# EAGLE board sparkfun-battery-babysitter-panel-v10 (EAGLE 7.5.0), part 1 of 7
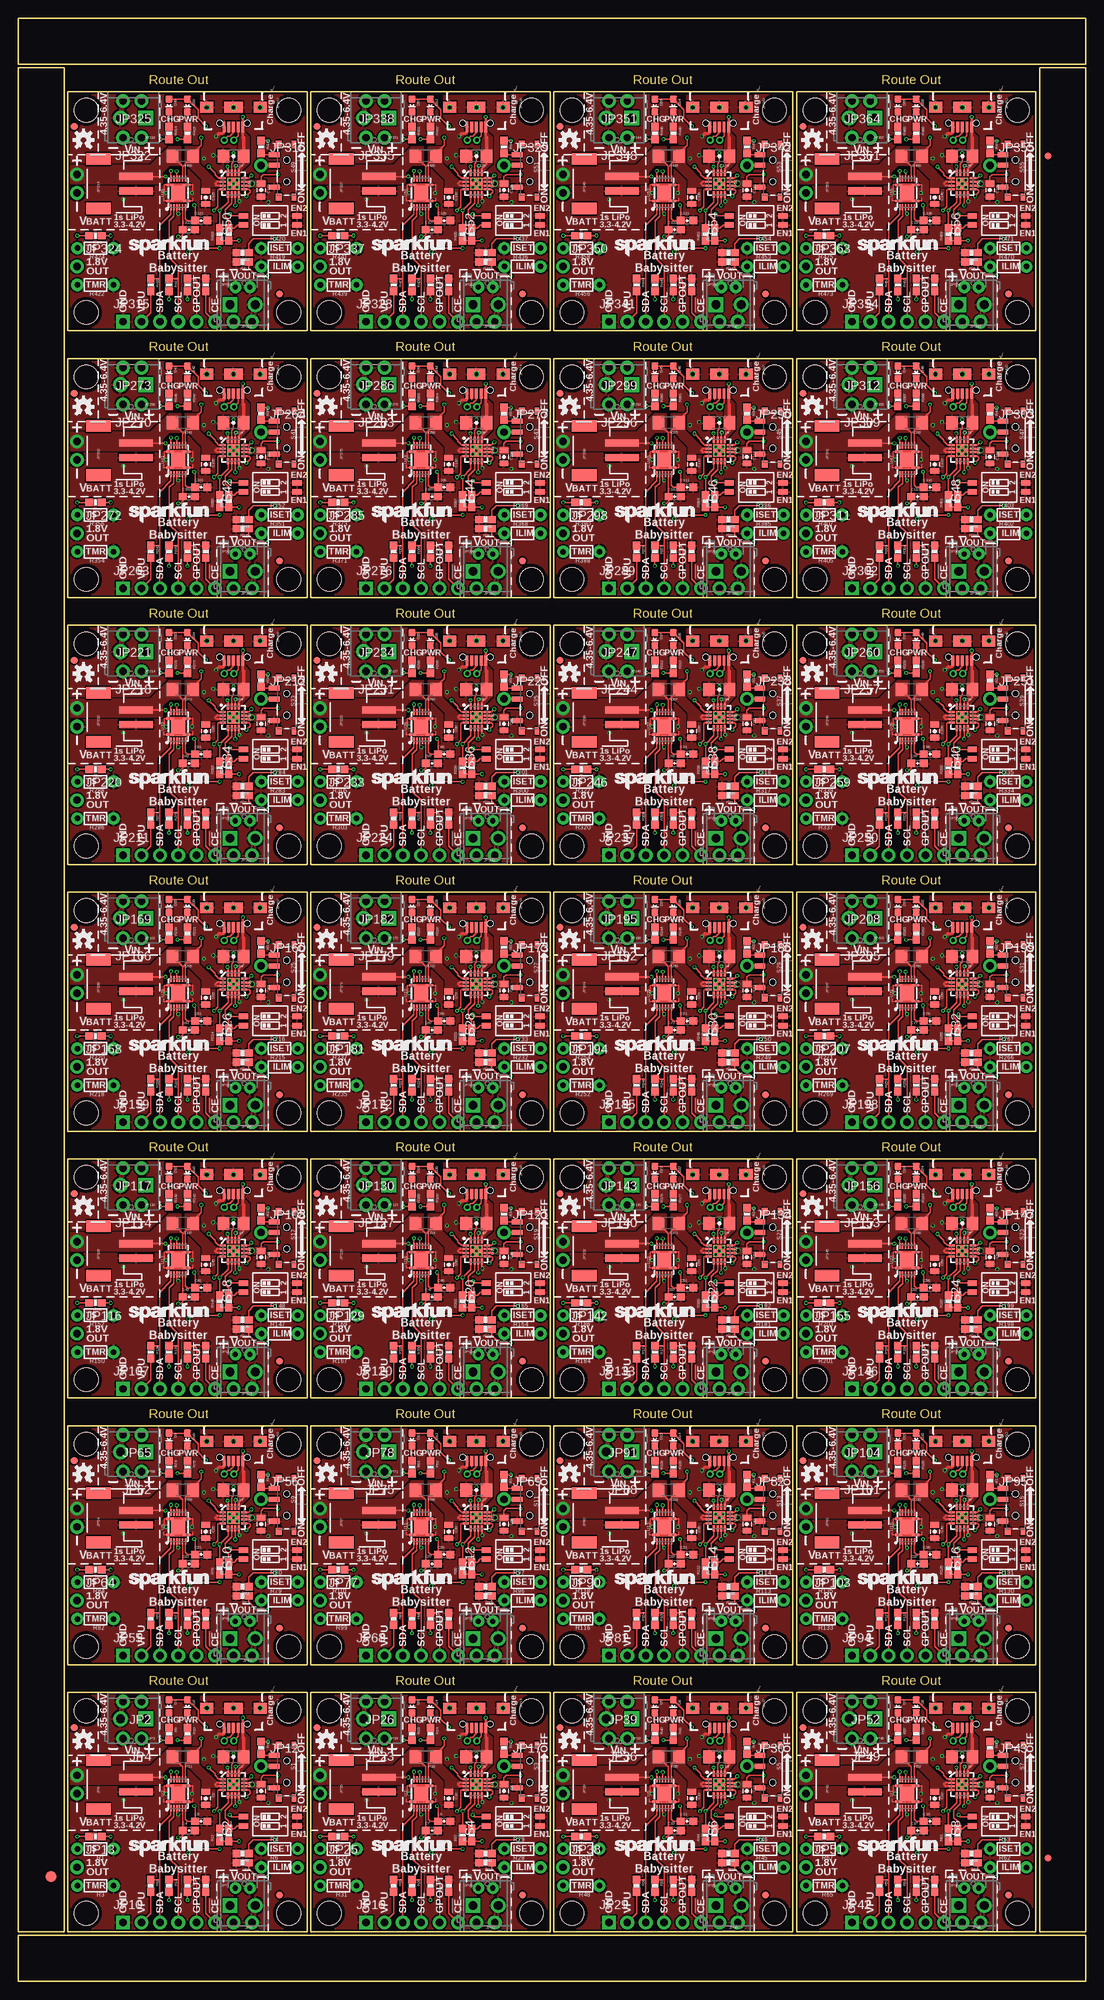
[diagram p0: board, top side]
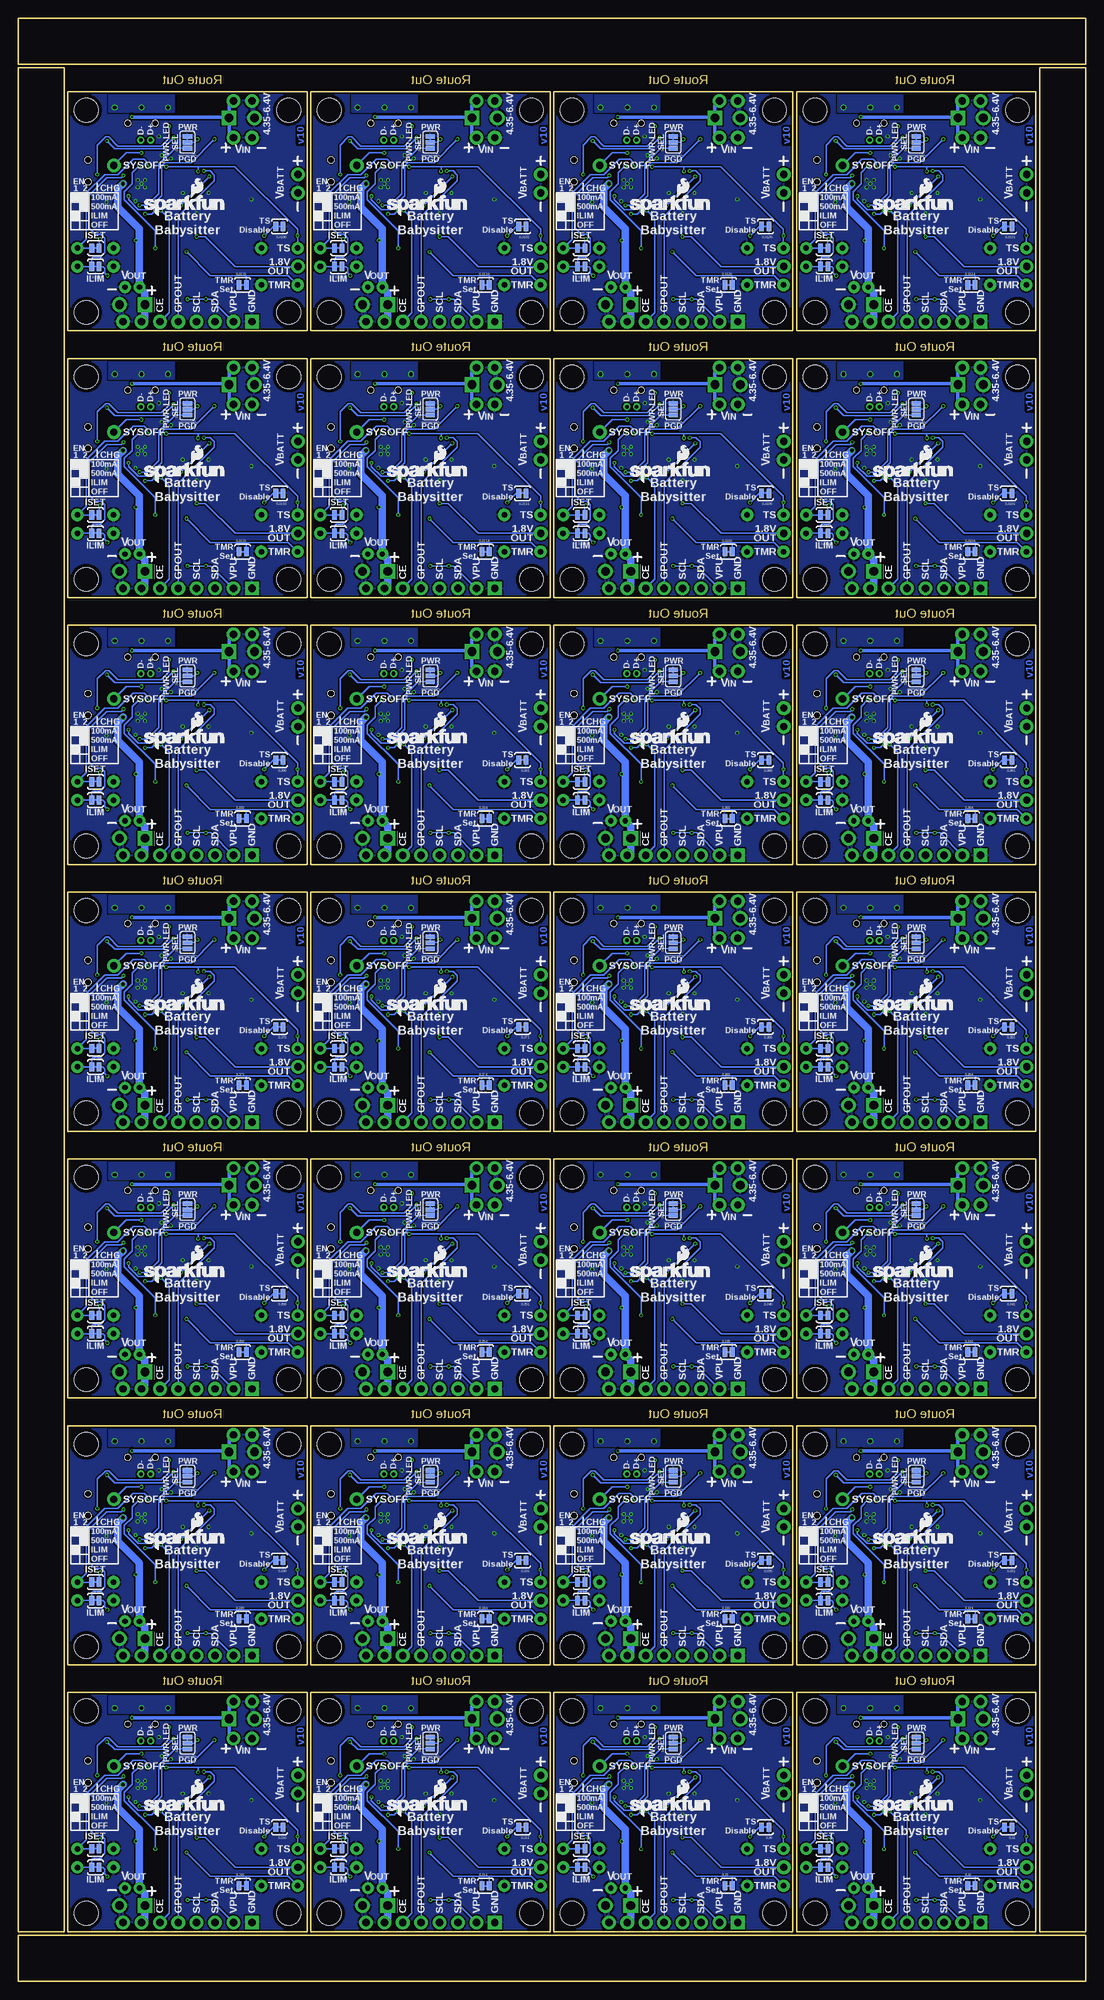
[diagram p1: board, bottom side, seen from below]

Size 147.32 x 271.02 mm. Coordinates in mm from the lower left corner, seen from the top.
Outline: 6.35,79.25 6.35,6.86 0,6.86 0,29.72
Outline: 0,27.18 0,264.16 6.35,264.16 6.35,76.71
Outline: 79.25,0 0,0 0,6.35 29.72,6.35
Outline: 27.18,6.35 147.32,6.35 147.32,0 76.71,0
Outline: 147.32,79.25 147.32,6.86 140.97,6.86 140.97,29.72
Outline: 140.97,27.18 140.97,264.16 147.32,264.16 147.32,76.71
Outline: 71.63,271.02 147.32,271.02 147.32,264.67 121.16,264.67
Outline: 123.7,264.67 0,264.67 0,271.02 74.17,271.02
Outline: 6.86,39.88 39.88,39.88 39.88,6.86 6.86,6.86 6.86,39.88
Outline: 40.39,39.88 73.41,39.88 73.41,6.86 40.39,6.86 40.39,39.88
Outline: 73.91,39.88 106.93,39.88 106.93,6.86 73.91,6.86 73.91,39.88
Outline: 107.44,39.88 140.46,39.88 140.46,6.86 107.44,6.86 107.44,39.88
Outline: 6.86,76.71 39.88,76.71 39.88,43.69 6.86,43.69 6.86,76.71
Outline: 40.39,76.71 73.41,76.71 73.41,43.69 40.39,43.69 40.39,76.71
Outline: 73.91,76.71 106.93,76.71 106.93,43.69 73.91,43.69 73.91,76.71
Outline: 107.44,76.71 140.46,76.71 140.46,43.69 107.44,43.69 107.44,76.71
Outline: 6.86,113.54 39.88,113.54 39.88,80.52 6.86,80.52 6.86,113.54
Outline: 40.39,113.54 73.41,113.54 73.41,80.52 40.39,80.52 40.39,113.54
Outline: 73.91,113.54 106.93,113.54 106.93,80.52 73.91,80.52 73.91,113.54
Outline: 107.44,113.54 140.46,113.54 140.46,80.52 107.44,80.52 107.44,113.54
Outline: 6.86,150.37 39.88,150.37 39.88,117.35 6.86,117.35 6.86,150.37
Outline: 40.39,150.37 73.41,150.37 73.41,117.35 40.39,117.35 40.39,150.37
Outline: 73.91,150.37 106.93,150.37 106.93,117.35 73.91,117.35 73.91,150.37
Outline: 107.44,150.37 140.46,150.37 140.46,117.35 107.44,117.35 107.44,150.37
Outline: 6.86,187.2 39.88,187.2 39.88,154.18 6.86,154.18 6.86,187.2
Outline: 40.39,187.2 73.41,187.2 73.41,154.18 40.39,154.18 40.39,187.2
Outline: 73.91,187.2 106.93,187.2 106.93,154.18 73.91,154.18 73.91,187.2
Outline: 107.44,187.2 140.46,187.2 140.46,154.18 107.44,154.18 107.44,187.2
Outline: 6.86,224.03 39.88,224.03 39.88,191.01 6.86,191.01 6.86,224.03
Outline: 40.39,224.03 73.41,224.03 73.41,191.01 40.39,191.01 40.39,224.03
Outline: 73.91,224.03 106.93,224.03 106.93,191.01 73.91,191.01 73.91,224.03
Outline: 107.44,224.03 140.46,224.03 140.46,191.01 107.44,191.01 107.44,224.03
Outline: 6.86,260.86 39.88,260.86 39.88,227.84 6.86,227.84 6.86,260.86
Outline: 40.39,260.86 73.41,260.86 73.41,227.84 40.39,227.84 40.39,260.86
Outline: 73.91,260.86 106.93,260.86 106.93,227.84 73.91,227.84 73.91,260.86
Outline: 107.44,260.86 140.46,260.86 140.46,227.84 107.44,227.84 107.44,260.86
Copper layers (1*16): Top 0.035mm / dielectric 1.5mm / Bottom 0.035mm
Design rules "SparkFun-2-layer-FAB-LIMIT *": minimum track width 7mil, minimum drill 6mil, track to track 7mil, track to pad 7mil, pad to pad 7mil, via to via 7mil, smd to smd 7mil, copper to edge 7mil, drill to drill 7mil, minimum pad ring 5mil, minimum via ring 5mil, stop-mask expansion 4mil, vias tented up to drill 20mil, thermal gap 10mil

## Footprints (pad centres in the part's own frame; a part is rotated, then mirrored left to right if it is on the bottom)
1206-CAP = smd 1.6 x 1.8: 1 -1.4,0; 2 1.4,0
0805-CAP = smd 0.8 x 1.2: 1 -0.9,0; 2 0.9,0
0603-CAP = smd 1.1 x 1: 1 -0.85,0; 2 0.85,0
LED-0603 = smd 1 x 1: A 0,-0.877; C 0,0.877
FIDUCIAL-1.5X3 = smd 1.5 x 1.5: 1 0,0
FIDUCIAL-1X2 = smd 1 x 1: 1 0,0
USB-AB-MICRO-SMD_V03 = smd 1.4 x 0.4: D+1 2.7,0; D-1 2.7,0.65; GND1 2.7,-1.3; ID1 2.7,-0.65; VBUS1 2.7,1.3 | smd 1.5 x 1.8: SHIELD1 0,3.68; SHIELD3 0,-3.68 | smd 1.5 x 2.5: SHIELD2 0,0 | hole 0.85: 2.2,1.9; 2.2,-1.9
1X02_NO_SILK = drill 1.016 pad 1.88: 1 0,0; 2 2.54,0
SCREWTERMINAL-3.5MM-2-NS = drill 1.2 pad 2.032 square: 1 0,0 | drill 1.2 pad 2.032: 2 3.5,0
JST-2-SMD = smd 1 x 4.6: 1 -1,-3.7; 2 1,-3.7 | smd 1.6 x 3.4: NC1 -3.4,1.5; NC2 3.4,1.5
JST-2-PTH-NS = drill 0.7 pad 1.6: 1 -1,0; 2 1,0
1X04_NO_SILK = drill 1.016 pad 1.88 square: 1 0,0 | drill 1.016 pad 1.88: 2 2.54,0; 3 5.08,0; 4 7.62,0
1X01_NO_SILK = drill 1.016 pad 1.88: 1 0,0
1/6W-RES = drill 0.762 pad 1.676: 1 -2.5,0; 2 2.5,0
0603-RES = smd 1.1 x 1: 1 -0.85,0; 2 0.85,0
1206 = smd 1.6 x 1.8: 1 -1.4,0; 2 1.4,0
SWITCH-SPST-SMD-A = smd 0.7 x 1.5: 1 -2.25,-1.75; 2 -0.75,-1.75; 3 2.25,-1.75 | smd 1 x 0.6: GND1 -3.65,1; GND3 3.65,1 | smd 1 x 0.8: GND2 -3.65,-1.1; GND4 3.65,-1.1 | hole 0.9: -1.5,0; 1.5,0
DIPSWITCH-02-50MIL = smd 0.762 x 1.27: 1 -0.635,-3.7; 2 0.635,-3.7; 3 0.635,3.7; 4 -0.635,3.7
PAD-JUMPER-2-NC_BY_TRACE_YES_SILK = smd 0.635 x 1.27: 1 -0.508,0; 2 0.508,0
PAD-JUMPER-3-2OF3_NC_BY_TRACE_YES_SILK_FULL_BOX = smd 0.635 x 1.27: 1 -0.813,0; 2 0,0; 3 0.813,0
STAND-OFF = hole 3.302: 0,0
PAD.03X.04 = smd 1.016 x 1.016: P$1 0,0
PVQFN-N16 = smd 0.28 x 0.85: 1 -0.75,-1.475; 2 -0.25,-1.475; 3 0.25,-1.475; 4 0.75,-1.475; 9 0.75,1.475; 10 0.25,1.475; 11 -0.25,1.475; 12 -0.75,1.475 | smd 0.85 x 0.28: 5 1.475,-0.75; 6 1.475,-0.25; 7 1.475,0.25; 8 1.475,0.75; 13 -1.475,0.75; 14 -1.475,0.25; 15 -1.475,-0.25; 16 -1.475,-0.75 | smd 1.7 x 1.7: EP 0,0
PDSO-N12 = smd 0.2 x 0.85: 1 -1,-1.975; 2 -0.6,-1.975; 3 -0.2,-1.975; 4 0.2,-1.975; 5 0.6,-1.975; 6 1,-1.975; 7 1,1.975; 8 0.6,1.975; 9 0.2,1.975; 10 -0.2,1.975; 11 -0.6,1.975; 12 -1,1.975 | smd 1.95 x 1.95: EP 0,0 | smd 1 x 0.25: EP1 -1.15,1.1; EP2 -1.15,-1.1; EP3 1.15,-1.1; EP4 1.15,1.1

## Placement (x,y rotation side)
C1  1.0uF  [1206-CAP]  29.72,30.99 180 top
C2  10uF  [0805-CAP]  25.91,25.27 270 top
C3  10uF  [0805-CAP]  33.53,26.29 270 top
C4  0.47uF  [0603-CAP]  23.56,20.83 0 top
C5  1.0uF  [0603-CAP]  25.27,22.1 0 top
C6  1.0uF  [0603-CAP]  58.8,22.1 0 top
C7  0.47uF  [0603-CAP]  57.09,20.83 0 top
C8  10uF  [0805-CAP]  67.06,26.29 270 top
C9  1.0uF  [1206-CAP]  63.25,30.99 180 top
C10  10uF  [0805-CAP]  59.44,25.27 270 top
C11  1.0uF  [0603-CAP]  92.33,22.1 0 top
C12  0.47uF  [0603-CAP]  90.61,20.83 0 top
C13  10uF  [0805-CAP]  100.58,26.29 270 top
C14  1.0uF  [1206-CAP]  96.77,30.99 180 top
C15  10uF  [0805-CAP]  92.96,25.27 270 top
C16  1.0uF  [0603-CAP]  125.86,22.1 0 top
C17  0.47uF  [0603-CAP]  124.14,20.83 0 top
C18  10uF  [0805-CAP]  134.11,26.29 270 top
C19  1.0uF  [1206-CAP]  130.3,30.99 180 top
C20  10uF  [0805-CAP]  126.49,25.27 270 top
C21  1.0uF  [0603-CAP]  25.27,58.93 0 top
C22  0.47uF  [0603-CAP]  23.56,57.66 0 top
C23  10uF  [0805-CAP]  33.53,63.12 270 top
C24  1.0uF  [1206-CAP]  29.72,67.82 180 top
C25  10uF  [0805-CAP]  25.91,62.1 270 top
C26  1.0uF  [0603-CAP]  58.8,58.93 0 top
C27  0.47uF  [0603-CAP]  57.09,57.66 0 top
C28  10uF  [0805-CAP]  67.06,63.12 270 top
C29  1.0uF  [1206-CAP]  63.25,67.82 180 top
C30  10uF  [0805-CAP]  59.44,62.1 270 top
C31  1.0uF  [0603-CAP]  92.33,58.93 0 top
C32  0.47uF  [0603-CAP]  90.61,57.66 0 top
C33  10uF  [0805-CAP]  100.58,63.12 270 top
C34  1.0uF  [1206-CAP]  96.77,67.82 180 top
C35  10uF  [0805-CAP]  92.96,62.1 270 top
C36  1.0uF  [0603-CAP]  125.86,58.93 0 top
C37  0.47uF  [0603-CAP]  124.14,57.66 0 top
C38  10uF  [0805-CAP]  134.11,63.12 270 top
C39  1.0uF  [1206-CAP]  130.3,67.82 180 top
C40  10uF  [0805-CAP]  126.49,62.1 270 top
C41  1.0uF  [0603-CAP]  25.27,95.76 0 top
C42  0.47uF  [0603-CAP]  23.56,94.49 0 top
C43  10uF  [0805-CAP]  33.53,99.95 270 top
C44  1.0uF  [1206-CAP]  29.72,104.65 180 top
C45  10uF  [0805-CAP]  25.91,98.93 270 top
C46  1.0uF  [0603-CAP]  58.8,95.76 0 top
C47  0.47uF  [0603-CAP]  57.09,94.49 0 top
C48  10uF  [0805-CAP]  67.06,99.95 270 top
C49  1.0uF  [1206-CAP]  63.25,104.65 180 top
C50  10uF  [0805-CAP]  59.44,98.93 270 top
C51  1.0uF  [0603-CAP]  92.33,95.76 0 top
C52  0.47uF  [0603-CAP]  90.61,94.49 0 top
C53  10uF  [0805-CAP]  100.58,99.95 270 top
C54  1.0uF  [1206-CAP]  96.77,104.65 180 top
C55  10uF  [0805-CAP]  92.96,98.93 270 top
C56  1.0uF  [0603-CAP]  125.86,95.76 0 top
C57  0.47uF  [0603-CAP]  124.14,94.49 0 top
C58  10uF  [0805-CAP]  134.11,99.95 270 top
C59  1.0uF  [1206-CAP]  130.3,104.65 180 top
C60  10uF  [0805-CAP]  126.49,98.93 270 top
C61  1.0uF  [0603-CAP]  25.27,132.59 0 top
C62  0.47uF  [0603-CAP]  23.56,131.32 0 top
C63  10uF  [0805-CAP]  33.53,136.78 270 top
C64  1.0uF  [1206-CAP]  29.72,141.48 180 top
C65  10uF  [0805-CAP]  25.91,135.76 270 top
C66  1.0uF  [0603-CAP]  58.8,132.59 0 top
C67  0.47uF  [0603-CAP]  57.09,131.32 0 top
C68  10uF  [0805-CAP]  67.06,136.78 270 top
C69  1.0uF  [1206-CAP]  63.25,141.48 180 top
C70  10uF  [0805-CAP]  59.44,135.76 270 top
C71  1.0uF  [0603-CAP]  92.33,132.59 0 top
C72  0.47uF  [0603-CAP]  90.61,131.32 0 top
C73  10uF  [0805-CAP]  100.58,136.78 270 top
C74  1.0uF  [1206-CAP]  96.77,141.48 180 top
C75  10uF  [0805-CAP]  92.96,135.76 270 top
C76  1.0uF  [0603-CAP]  125.86,132.59 0 top
C77  0.47uF  [0603-CAP]  124.14,131.32 0 top
C78  10uF  [0805-CAP]  134.11,136.78 270 top
C79  1.0uF  [1206-CAP]  130.3,141.48 180 top
C80  10uF  [0805-CAP]  126.49,135.76 270 top
C81  1.0uF  [0603-CAP]  25.27,169.42 0 top
C82  0.47uF  [0603-CAP]  23.56,168.15 0 top
C83  10uF  [0805-CAP]  33.53,173.61 270 top
C84  1.0uF  [1206-CAP]  29.72,178.31 180 top
C85  10uF  [0805-CAP]  25.91,172.59 270 top
C86  1.0uF  [0603-CAP]  58.8,169.42 0 top
C87  0.47uF  [0603-CAP]  57.09,168.15 0 top
C88  10uF  [0805-CAP]  67.06,173.61 270 top
C89  1.0uF  [1206-CAP]  63.25,178.31 180 top
C90  10uF  [0805-CAP]  59.44,172.59 270 top
C91  1.0uF  [0603-CAP]  92.33,169.42 0 top
C92  0.47uF  [0603-CAP]  90.61,168.15 0 top
C93  10uF  [0805-CAP]  100.58,173.61 270 top
C94  1.0uF  [1206-CAP]  96.77,178.31 180 top
C95  10uF  [0805-CAP]  92.96,172.59 270 top
C96  1.0uF  [0603-CAP]  125.86,169.42 0 top
C97  0.47uF  [0603-CAP]  124.14,168.15 0 top
C98  10uF  [0805-CAP]  134.11,173.61 270 top
C99  1.0uF  [1206-CAP]  130.3,178.31 180 top
C100  10uF  [0805-CAP]  126.49,172.59 270 top
C101  1.0uF  [0603-CAP]  25.27,206.25 0 top
C102  0.47uF  [0603-CAP]  23.56,204.98 0 top
C103  10uF  [0805-CAP]  33.53,210.44 270 top
C104  1.0uF  [1206-CAP]  29.72,215.14 180 top
C105  10uF  [0805-CAP]  25.91,209.42 270 top
C106  1.0uF  [0603-CAP]  58.8,206.25 0 top
C107  0.47uF  [0603-CAP]  57.09,204.98 0 top
C108  10uF  [0805-CAP]  67.06,210.44 270 top
C109  1.0uF  [1206-CAP]  63.25,215.14 180 top
C110  10uF  [0805-CAP]  59.44,209.42 270 top
C111  1.0uF  [0603-CAP]  92.33,206.25 0 top
C112  0.47uF  [0603-CAP]  90.61,204.98 0 top
C113  10uF  [0805-CAP]  100.58,210.44 270 top
C114  1.0uF  [1206-CAP]  96.77,215.14 180 top
C115  10uF  [0805-CAP]  92.96,209.42 270 top
C116  1.0uF  [0603-CAP]  125.86,206.25 0 top
C117  0.47uF  [0603-CAP]  124.14,204.98 0 top
C118  10uF  [0805-CAP]  134.11,210.44 270 top
C119  1.0uF  [1206-CAP]  130.3,215.14 180 top
C120  10uF  [0805-CAP]  126.49,209.42 270 top
C121  1.0uF  [0603-CAP]  25.27,243.08 0 top
C122  0.47uF  [0603-CAP]  23.56,241.81 0 top
C123  10uF  [0805-CAP]  33.53,247.27 270 top
C124  1.0uF  [1206-CAP]  29.72,251.97 180 top
C125  10uF  [0805-CAP]  25.91,246.25 270 top
C126  1.0uF  [0603-CAP]  58.8,243.08 0 top
C127  0.47uF  [0603-CAP]  57.09,241.81 0 top
C128  10uF  [0805-CAP]  67.06,247.27 270 top
C129  1.0uF  [1206-CAP]  63.25,251.97 180 top
C130  10uF  [0805-CAP]  59.44,246.25 270 top
C131  1.0uF  [0603-CAP]  92.33,243.08 0 top
C132  0.47uF  [0603-CAP]  90.61,241.81 0 top
C133  10uF  [0805-CAP]  100.58,247.27 270 top
C134  1.0uF  [1206-CAP]  96.77,251.97 180 top
C135  10uF  [0805-CAP]  92.96,246.25 270 top
C136  1.0uF  [0603-CAP]  125.86,243.08 0 top
C137  0.47uF  [0603-CAP]  124.14,241.81 0 top
C138  10uF  [0805-CAP]  134.11,247.27 270 top
C139  1.0uF  [1206-CAP]  130.3,251.97 180 top
C140  10uF  [0805-CAP]  126.49,246.25 270 top
D1  BLUE  [LED-0603]  20.83,37.97 180 top
D2  RED  [LED-0603]  23.37,37.97 180 top
D3  BLUE  [LED-0603]  54.36,37.97 180 top
D4  RED  [LED-0603]  56.9,37.97 180 top
D5  BLUE  [LED-0603]  87.88,37.97 180 top
D6  RED  [LED-0603]  90.42,37.97 180 top
D7  BLUE  [LED-0603]  121.41,37.97 180 top
D8  RED  [LED-0603]  123.95,37.97 180 top
D9  BLUE  [LED-0603]  20.83,74.8 180 top
D10  RED  [LED-0603]  23.37,74.8 180 top
D11  BLUE  [LED-0603]  54.36,74.8 180 top
D12  RED  [LED-0603]  56.9,74.8 180 top
D13  BLUE  [LED-0603]  87.88,74.8 180 top
D14  RED  [LED-0603]  90.42,74.8 180 top
D15  BLUE  [LED-0603]  121.41,74.8 180 top
D16  RED  [LED-0603]  123.95,74.8 180 top
D17  BLUE  [LED-0603]  20.83,111.63 180 top
D18  RED  [LED-0603]  23.37,111.63 180 top
D19  BLUE  [LED-0603]  54.36,111.63 180 top
D20  RED  [LED-0603]  56.9,111.63 180 top
D21  BLUE  [LED-0603]  87.88,111.63 180 top
D22  RED  [LED-0603]  90.42,111.63 180 top
D23  BLUE  [LED-0603]  121.41,111.63 180 top
D24  RED  [LED-0603]  123.95,111.63 180 top
D25  BLUE  [LED-0603]  20.83,148.46 180 top
D26  RED  [LED-0603]  23.37,148.46 180 top
D27  BLUE  [LED-0603]  54.36,148.46 180 top
D28  RED  [LED-0603]  56.9,148.46 180 top
D29  BLUE  [LED-0603]  87.88,148.46 180 top
D30  RED  [LED-0603]  90.42,148.46 180 top
D31  BLUE  [LED-0603]  121.41,148.46 180 top
D32  RED  [LED-0603]  123.95,148.46 180 top
D33  BLUE  [LED-0603]  20.83,185.29 180 top
D34  RED  [LED-0603]  23.37,185.29 180 top
D35  BLUE  [LED-0603]  54.36,185.29 180 top
D36  RED  [LED-0603]  56.9,185.29 180 top
D37  BLUE  [LED-0603]  87.88,185.29 180 top
D38  RED  [LED-0603]  90.42,185.29 180 top
D39  BLUE  [LED-0603]  121.41,185.29 180 top
D40  RED  [LED-0603]  123.95,185.29 180 top
D41  BLUE  [LED-0603]  20.83,222.12 180 top
D42  RED  [LED-0603]  23.37,222.12 180 top
D43  BLUE  [LED-0603]  54.36,222.12 180 top
D44  RED  [LED-0603]  56.9,222.12 180 top
D45  BLUE  [LED-0603]  87.88,222.12 180 top
D46  RED  [LED-0603]  90.42,222.12 180 top
D47  BLUE  [LED-0603]  121.41,222.12 180 top
D48  RED  [LED-0603]  123.95,222.12 180 top
D49  BLUE  [LED-0603]  20.83,258.95 180 top
D50  RED  [LED-0603]  23.37,258.95 180 top
D51  BLUE  [LED-0603]  54.36,258.95 180 top
D52  RED  [LED-0603]  56.9,258.95 180 top
D53  BLUE  [LED-0603]  87.88,258.95 180 top
D54  RED  [LED-0603]  90.42,258.95 180 top
D55  BLUE  [LED-0603]  121.41,258.95 180 top
D56  RED  [LED-0603]  123.95,258.95 180 top
E$1  [FIDUCIAL-1.5X3]  4.57,14.48 0 top
E$5  [FIDUCIAL-1X2]  142.11,17.02 0 top
E$6  [FIDUCIAL-1X2]  142.11,251.97 180 top
FID1  FIDUCIAL1X2  [FIDUCIAL-1X2]  7.75,35.05 0 top
FID2  FIDUCIAL1X2  [FIDUCIAL-1X2]  36.07,11.94 0 top
FID3  FIDUCIAL1X2  [FIDUCIAL-1X2]  41.27,35.05 0 top
FID4  FIDUCIAL1X2  [FIDUCIAL-1X2]  69.6,11.94 0 top
FID5  FIDUCIAL1X2  [FIDUCIAL-1X2]  74.8,35.05 0 top
FID6  FIDUCIAL1X2  [FIDUCIAL-1X2]  103.12,11.94 0 top
FID7  FIDUCIAL1X2  [FIDUCIAL-1X2]  108.33,35.05 0 top
FID8  FIDUCIAL1X2  [FIDUCIAL-1X2]  136.65,11.94 0 top
FID9  FIDUCIAL1X2  [FIDUCIAL-1X2]  7.75,71.88 0 top
FID10  FIDUCIAL1X2  [FIDUCIAL-1X2]  36.07,48.77 0 top
FID11  FIDUCIAL1X2  [FIDUCIAL-1X2]  41.27,71.88 0 top
FID12  FIDUCIAL1X2  [FIDUCIAL-1X2]  69.6,48.77 0 top
FID13  FIDUCIAL1X2  [FIDUCIAL-1X2]  74.8,71.88 0 top
FID14  FIDUCIAL1X2  [FIDUCIAL-1X2]  103.12,48.77 0 top
FID15  FIDUCIAL1X2  [FIDUCIAL-1X2]  108.33,71.88 0 top
FID16  FIDUCIAL1X2  [FIDUCIAL-1X2]  136.65,48.77 0 top
FID17  FIDUCIAL1X2  [FIDUCIAL-1X2]  7.75,108.71 0 top
FID18  FIDUCIAL1X2  [FIDUCIAL-1X2]  36.07,85.6 0 top
FID19  FIDUCIAL1X2  [FIDUCIAL-1X2]  41.27,108.71 0 top
FID20  FIDUCIAL1X2  [FIDUCIAL-1X2]  69.6,85.6 0 top
FID21  FIDUCIAL1X2  [FIDUCIAL-1X2]  74.8,108.71 0 top
FID22  FIDUCIAL1X2  [FIDUCIAL-1X2]  103.12,85.6 0 top
FID23  FIDUCIAL1X2  [FIDUCIAL-1X2]  108.33,108.71 0 top
FID24  FIDUCIAL1X2  [FIDUCIAL-1X2]  136.65,85.6 0 top
FID25  FIDUCIAL1X2  [FIDUCIAL-1X2]  7.75,145.54 0 top
FID26  FIDUCIAL1X2  [FIDUCIAL-1X2]  36.07,122.43 0 top
FID27  FIDUCIAL1X2  [FIDUCIAL-1X2]  41.27,145.54 0 top
FID28  FIDUCIAL1X2  [FIDUCIAL-1X2]  69.6,122.43 0 top
FID29  FIDUCIAL1X2  [FIDUCIAL-1X2]  74.8,145.54 0 top
FID30  FIDUCIAL1X2  [FIDUCIAL-1X2]  103.12,122.43 0 top
FID31  FIDUCIAL1X2  [FIDUCIAL-1X2]  108.33,145.54 0 top
FID32  FIDUCIAL1X2  [FIDUCIAL-1X2]  136.65,122.43 0 top
FID33  FIDUCIAL1X2  [FIDUCIAL-1X2]  7.75,182.37 0 top
FID34  FIDUCIAL1X2  [FIDUCIAL-1X2]  36.07,159.26 0 top
FID35  FIDUCIAL1X2  [FIDUCIAL-1X2]  41.27,182.37 0 top
FID36  FIDUCIAL1X2  [FIDUCIAL-1X2]  69.6,159.26 0 top
FID37  FIDUCIAL1X2  [FIDUCIAL-1X2]  74.8,182.37 0 top
FID38  FIDUCIAL1X2  [FIDUCIAL-1X2]  103.12,159.26 0 top
FID39  FIDUCIAL1X2  [FIDUCIAL-1X2]  108.33,182.37 0 top
FID40  FIDUCIAL1X2  [FIDUCIAL-1X2]  136.65,159.26 0 top
FID41  FIDUCIAL1X2  [FIDUCIAL-1X2]  7.75,219.2 0 top
FID42  FIDUCIAL1X2  [FIDUCIAL-1X2]  36.07,196.09 0 top
FID43  FIDUCIAL1X2  [FIDUCIAL-1X2]  41.27,219.2 0 top
FID44  FIDUCIAL1X2  [FIDUCIAL-1X2]  69.6,196.09 0 top
FID45  FIDUCIAL1X2  [FIDUCIAL-1X2]  74.8,219.2 0 top
FID46  FIDUCIAL1X2  [FIDUCIAL-1X2]  103.12,196.09 0 top
FID47  FIDUCIAL1X2  [FIDUCIAL-1X2]  108.33,219.2 0 top
FID48  FIDUCIAL1X2  [FIDUCIAL-1X2]  136.65,196.09 0 top
FID49  FIDUCIAL1X2  [FIDUCIAL-1X2]  7.75,256.03 0 top
FID50  FIDUCIAL1X2  [FIDUCIAL-1X2]  36.07,232.92 0 top
FID51  FIDUCIAL1X2  [FIDUCIAL-1X2]  41.27,256.03 0 top
FID52  FIDUCIAL1X2  [FIDUCIAL-1X2]  69.6,232.92 0 top
FID53  FIDUCIAL1X2  [FIDUCIAL-1X2]  74.8,256.03 0 top
FID54  FIDUCIAL1X2  [FIDUCIAL-1X2]  103.12,232.92 0 top
FID55  FIDUCIAL1X2  [FIDUCIAL-1X2]  108.33,256.03 0 top
FID56  FIDUCIAL1X2  [FIDUCIAL-1X2]  136.65,232.92 0 top
JP1  [USB-AB-MICRO-SMD_V03]  29.72,37.72 270 top
JP2  [1X02_NO_SILK]  17.02,38.61 180 top
JP3  [SCREWTERMINAL-3.5MM-2-NS]  17.62,36.26 180 top
JP4  [1X02_NO_SILK]  17.02,33.53 180 top
JP5  [1X02_NO_SILK]  8.13,25.91 90 top
JP6  [JST-2-SMD]  12.57,27.18 90 top
JP7  [SCREWTERMINAL-3.5MM-2-NS]  29.24,10.48 0 top
JP8  [1X02_NO_SILK]  32.26,8.13 180 top
JP9  [JST-2-PTH-NS]  30.99,12.89 180 top
JP10  [1X04_NO_SILK]  14.48,8.13 0 top
JP11  [1X02_NO_SILK]  27.18,8.13 180 top
JP12  [1X01_NO_SILK]  33.53,29.72 0 top
JP13  [1X01_NO_SILK]  8.13,15.75 0 top
JP14  [USB-AB-MICRO-SMD_V03]  63.25,37.72 270 top
JP15  [JST-2-SMD]  46.1,27.18 90 top
JP16  [1X04_NO_SILK]  48.01,8.13 0 top
JP17  [1X01_NO_SILK]  67.06,29.72 0 top
JP18  [1X02_NO_SILK]  41.66,25.91 90 top
JP19  [SCREWTERMINAL-3.5MM-2-NS]  51.15,36.26 180 top
JP20  [SCREWTERMINAL-3.5MM-2-NS]  62.77,10.48 0 top
JP21  [1X02_NO_SILK]  65.79,8.13 180 top
JP22  [JST-2-PTH-NS]  64.52,12.89 180 top
JP23  [1X02_NO_SILK]  50.55,33.53 180 top
JP24  [1X02_NO_SILK]  60.71,8.13 180 top
JP25  [1X01_NO_SILK]  41.66,15.75 0 top
JP26  [1X02_NO_SILK]  50.55,38.61 180 top
JP27  [USB-AB-MICRO-SMD_V03]  96.77,37.72 270 top
JP28  [JST-2-SMD]  79.63,27.18 90 top
JP29  [1X04_NO_SILK]  81.53,8.13 0 top
JP30  [1X01_NO_SILK]  100.58,29.72 0 top
JP31  [1X02_NO_SILK]  75.18,25.91 90 top
JP32  [SCREWTERMINAL-3.5MM-2-NS]  84.68,36.26 180 top
JP33  [SCREWTERMINAL-3.5MM-2-NS]  96.29,10.48 0 top
JP34  [1X02_NO_SILK]  99.31,8.13 180 top
JP35  [JST-2-PTH-NS]  98.04,12.89 180 top
JP36  [1X02_NO_SILK]  84.07,33.53 180 top
JP37  [1X02_NO_SILK]  94.23,8.13 180 top
JP38  [1X01_NO_SILK]  75.18,15.75 0 top
JP39  [1X02_NO_SILK]  84.07,38.61 180 top
JP40  [USB-AB-MICRO-SMD_V03]  130.3,37.72 270 top
JP41  [JST-2-SMD]  113.16,27.18 90 top
JP42  [1X04_NO_SILK]  115.06,8.13 0 top
JP43  [1X01_NO_SILK]  134.11,29.72 0 top
JP44  [1X02_NO_SILK]  108.71,25.91 90 top
JP45  [SCREWTERMINAL-3.5MM-2-NS]  118.21,36.26 180 top
JP46  [SCREWTERMINAL-3.5MM-2-NS]  129.82,10.48 0 top
JP47  [1X02_NO_SILK]  132.84,8.13 180 top
JP48  [JST-2-PTH-NS]  131.57,12.89 180 top
JP49  [1X02_NO_SILK]  117.6,33.53 180 top
JP50  [1X02_NO_SILK]  127.76,8.13 180 top
JP51  [1X01_NO_SILK]  108.71,15.75 0 top
JP52  [1X02_NO_SILK]  117.6,38.61 180 top
JP53  [USB-AB-MICRO-SMD_V03]  29.72,74.55 270 top
JP54  [JST-2-SMD]  12.57,64.01 90 top
JP55  [1X04_NO_SILK]  14.48,44.96 0 top
JP56  [1X01_NO_SILK]  33.53,66.55 0 top
JP57  [1X02_NO_SILK]  8.13,62.74 90 top
JP58  [SCREWTERMINAL-3.5MM-2-NS]  17.62,73.09 180 top
JP59  [SCREWTERMINAL-3.5MM-2-NS]  29.24,47.31 0 top
JP60  [1X02_NO_SILK]  32.26,44.96 180 top
JP61  [JST-2-PTH-NS]  30.99,49.72 180 top
JP62  [1X02_NO_SILK]  17.02,70.36 180 top
JP63  [1X02_NO_SILK]  27.18,44.96 180 top
JP64  [1X01_NO_SILK]  8.13,52.58 0 top
JP65  [1X02_NO_SILK]  17.02,75.44 180 top
JP66  [USB-AB-MICRO-SMD_V03]  63.25,74.55 270 top
JP67  [JST-2-SMD]  46.1,64.01 90 top
JP68  [1X04_NO_SILK]  48.01,44.96 0 top
JP69  [1X01_NO_SILK]  67.06,66.55 0 top
JP70  [1X02_NO_SILK]  41.66,62.74 90 top
JP71  [SCREWTERMINAL-3.5MM-2-NS]  51.15,73.09 180 top
JP72  [SCREWTERMINAL-3.5MM-2-NS]  62.77,47.31 0 top
JP73  [1X02_NO_SILK]  65.79,44.96 180 top
JP74  [JST-2-PTH-NS]  64.52,49.72 180 top
JP75  [1X02_NO_SILK]  50.55,70.36 180 top
JP76  [1X02_NO_SILK]  60.71,44.96 180 top
JP77  [1X01_NO_SILK]  41.66,52.58 0 top
JP78  [1X02_NO_SILK]  50.55,75.44 180 top
JP79  [USB-AB-MICRO-SMD_V03]  96.77,74.55 270 top
JP80  [JST-2-SMD]  79.63,64.01 90 top
JP81  [1X04_NO_SILK]  81.53,44.96 0 top
JP82  [1X01_NO_SILK]  100.58,66.55 0 top
JP83  [1X02_NO_SILK]  75.18,62.74 90 top
JP84  [SCREWTERMINAL-3.5MM-2-NS]  84.68,73.09 180 top
JP85  [SCREWTERMINAL-3.5MM-2-NS]  96.29,47.31 0 top
JP86  [1X02_NO_SILK]  99.31,44.96 180 top
JP87  [JST-2-PTH-NS]  98.04,49.72 180 top
JP88  [1X02_NO_SILK]  84.07,70.36 180 top
JP89  [1X02_NO_SILK]  94.23,44.96 180 top
JP90  [1X01_NO_SILK]  75.18,52.58 0 top
JP91  [1X02_NO_SILK]  84.07,75.44 180 top
JP92  [USB-AB-MICRO-SMD_V03]  130.3,74.55 270 top
JP93  [JST-2-SMD]  113.16,64.01 90 top
JP94  [1X04_NO_SILK]  115.06,44.96 0 top
JP95  [1X01_NO_SILK]  134.11,66.55 0 top
JP96  [1X02_NO_SILK]  108.71,62.74 90 top
JP97  [SCREWTERMINAL-3.5MM-2-NS]  118.21,73.09 180 top
JP98  [SCREWTERMINAL-3.5MM-2-NS]  129.82,47.31 0 top
JP99  [1X02_NO_SILK]  132.84,44.96 180 top
JP100  [JST-2-PTH-NS]  131.57,49.72 180 top
JP101  [1X02_NO_SILK]  117.6,70.36 180 top
JP102  [1X02_NO_SILK]  127.76,44.96 180 top
JP103  [1X01_NO_SILK]  108.71,52.58 0 top
JP104  [1X02_NO_SILK]  117.6,75.44 180 top
JP105  [USB-AB-MICRO-SMD_V03]  29.72,111.38 270 top
JP106  [JST-2-SMD]  12.57,100.84 90 top
JP107  [1X04_NO_SILK]  14.48,81.79 0 top
JP108  [1X01_NO_SILK]  33.53,103.38 0 top
JP109  [1X02_NO_SILK]  8.13,99.57 90 top
JP110  [SCREWTERMINAL-3.5MM-2-NS]  17.62,109.92 180 top
JP111  [SCREWTERMINAL-3.5MM-2-NS]  29.24,84.14 0 top
JP112  [1X02_NO_SILK]  32.26,81.79 180 top
JP113  [JST-2-PTH-NS]  30.99,86.55 180 top
JP114  [1X02_NO_SILK]  17.02,107.19 180 top
JP115  [1X02_NO_SILK]  27.18,81.79 180 top
JP116  [1X01_NO_SILK]  8.13,89.41 0 top
JP117  [1X02_NO_SILK]  17.02,112.27 180 top
JP118  [USB-AB-MICRO-SMD_V03]  63.25,111.38 270 top
JP119  [JST-2-SMD]  46.1,100.84 90 top
JP120  [1X04_NO_SILK]  48.01,81.79 0 top
JP121  [1X01_NO_SILK]  67.06,103.38 0 top
JP122  [1X02_NO_SILK]  41.66,99.57 90 top
JP123  [SCREWTERMINAL-3.5MM-2-NS]  51.15,109.92 180 top
JP124  [SCREWTERMINAL-3.5MM-2-NS]  62.77,84.14 0 top
JP125  [1X02_NO_SILK]  65.79,81.79 180 top
JP126  [JST-2-PTH-NS]  64.52,86.55 180 top
JP127  [1X02_NO_SILK]  50.55,107.19 180 top
JP128  [1X02_NO_SILK]  60.71,81.79 180 top
JP129  [1X01_NO_SILK]  41.66,89.41 0 top
JP130  [1X02_NO_SILK]  50.55,112.27 180 top
JP131  [USB-AB-MICRO-SMD_V03]  96.77,111.38 270 top
JP132  [JST-2-SMD]  79.63,100.84 90 top
JP133  [1X04_NO_SILK]  81.53,81.79 0 top
JP134  [1X01_NO_SILK]  100.58,103.38 0 top
JP135  [1X02_NO_SILK]  75.18,99.57 90 top
JP136  [SCREWTERMINAL-3.5MM-2-NS]  84.68,109.92 180 top
JP137  [SCREWTERMINAL-3.5MM-2-NS]  96.29,84.14 0 top
JP138  [1X02_NO_SILK]  99.31,81.79 180 top
JP139  [JST-2-PTH-NS]  98.04,86.55 180 top
JP140  [1X02_NO_SILK]  84.07,107.19 180 top
JP141  [1X02_NO_SILK]  94.23,81.79 180 top
JP142  [1X01_NO_SILK]  75.18,89.41 0 top
JP143  [1X02_NO_SILK]  84.07,112.27 180 top
JP144  [USB-AB-MICRO-SMD_V03]  130.3,111.38 270 top
JP145  [JST-2-SMD]  113.16,100.84 90 top
JP146  [1X04_NO_SILK]  115.06,81.79 0 top
JP147  [1X01_NO_SILK]  134.11,103.38 0 top
JP148  [1X02_NO_SILK]  108.71,99.57 90 top
JP149  [SCREWTERMINAL-3.5MM-2-NS]  118.21,109.92 180 top
JP150  [SCREWTERMINAL-3.5MM-2-NS]  129.82,84.14 0 top
JP151  [1X02_NO_SILK]  132.84,81.79 180 top
JP152  [JST-2-PTH-NS]  131.57,86.55 180 top
JP153  [1X02_NO_SILK]  117.6,107.19 180 top
JP154  [1X02_NO_SILK]  127.76,81.79 180 top
JP155  [1X01_NO_SILK]  108.71,89.41 0 top
JP156  [1X02_NO_SILK]  117.6,112.27 180 top
JP157  [USB-AB-MICRO-SMD_V03]  29.72,148.21 270 top
JP158  [JST-2-SMD]  12.57,137.67 90 top
JP159  [1X04_NO_SILK]  14.48,118.62 0 top
JP160  [1X01_NO_SILK]  33.53,140.21 0 top
JP161  [1X02_NO_SILK]  8.13,136.4 90 top
JP162  [SCREWTERMINAL-3.5MM-2-NS]  17.62,146.75 180 top
JP163  [SCREWTERMINAL-3.5MM-2-NS]  29.24,120.97 0 top
JP164  [1X02_NO_SILK]  32.26,118.62 180 top
JP165  [JST-2-PTH-NS]  30.99,123.38 180 top
JP166  [1X02_NO_SILK]  17.02,144.02 180 top
JP167  [1X02_NO_SILK]  27.18,118.62 180 top
JP168  [1X01_NO_SILK]  8.13,126.24 0 top
JP169  [1X02_NO_SILK]  17.02,149.1 180 top
JP170  [USB-AB-MICRO-SMD_V03]  63.25,148.21 270 top
JP171  [JST-2-SMD]  46.1,137.67 90 top
JP172  [1X04_NO_SILK]  48.01,118.62 0 top
JP173  [1X01_NO_SILK]  67.06,140.21 0 top
JP174  [1X02_NO_SILK]  41.66,136.4 90 top
JP175  [SCREWTERMINAL-3.5MM-2-NS]  51.15,146.75 180 top
JP176  [SCREWTERMINAL-3.5MM-2-NS]  62.77,120.97 0 top
JP177  [1X02_NO_SILK]  65.79,118.62 180 top
JP178  [JST-2-PTH-NS]  64.52,123.38 180 top
JP179  [1X02_NO_SILK]  50.55,144.02 180 top
JP180  [1X02_NO_SILK]  60.71,118.62 180 top
JP181  [1X01_NO_SILK]  41.66,126.24 0 top
JP182  [1X02_NO_SILK]  50.55,149.1 180 top
JP183  [USB-AB-MICRO-SMD_V03]  96.77,148.21 270 top
JP184  [JST-2-SMD]  79.63,137.67 90 top
JP185  [1X04_NO_SILK]  81.53,118.62 0 top
JP186  [1X01_NO_SILK]  100.58,140.21 0 top
JP187  [1X02_NO_SILK]  75.18,136.4 90 top
JP188  [SCREWTERMINAL-3.5MM-2-NS]  84.68,146.75 180 top
JP189  [SCREWTERMINAL-3.5MM-2-NS]  96.29,120.97 0 top
JP190  [1X02_NO_SILK]  99.31,118.62 180 top
JP191  [JST-2-PTH-NS]  98.04,123.38 180 top
JP192  [1X02_NO_SILK]  84.07,144.02 180 top
JP193  [1X02_NO_SILK]  94.23,118.62 180 top
JP194  [1X01_NO_SILK]  75.18,126.24 0 top
JP195  [1X02_NO_SILK]  84.07,149.1 180 top
JP196  [USB-AB-MICRO-SMD_V03]  130.3,148.21 270 top
JP197  [JST-2-SMD]  113.16,137.67 90 top
JP198  [1X04_NO_SILK]  115.06,118.62 0 top
JP199  [1X01_NO_SILK]  134.11,140.21 0 top
JP200  [1X02_NO_SILK]  108.71,136.4 90 top
JP201  [SCREWTERMINAL-3.5MM-2-NS]  118.21,146.75 180 top
JP202  [SCREWTERMINAL-3.5MM-2-NS]  129.82,120.97 0 top
JP203  [1X02_NO_SILK]  132.84,118.62 180 top
JP204  [JST-2-PTH-NS]  131.57,123.38 180 top
JP205  [1X02_NO_SILK]  117.6,144.02 180 top
JP206  [1X02_NO_SILK]  127.76,118.62 180 top
JP207  [1X01_NO_SILK]  108.71,126.24 0 top
JP208  [1X02_NO_SILK]  117.6,149.1 180 top
JP209  [USB-AB-MICRO-SMD_V03]  29.72,185.04 270 top
JP210  [JST-2-SMD]  12.57,174.5 90 top
JP211  [1X04_NO_SILK]  14.48,155.45 0 top
JP212  [1X01_NO_SILK]  33.53,177.04 0 top
JP213  [1X02_NO_SILK]  8.13,173.23 90 top
JP214  [SCREWTERMINAL-3.5MM-2-NS]  17.62,183.58 180 top
JP215  [SCREWTERMINAL-3.5MM-2-NS]  29.24,157.8 0 top
JP216  [1X02_NO_SILK]  32.26,155.45 180 top
JP217  [JST-2-PTH-NS]  30.99,160.21 180 top
JP218  [1X02_NO_SILK]  17.02,180.85 180 top
JP219  [1X02_NO_SILK]  27.18,155.45 180 top
JP220  [1X01_NO_SILK]  8.13,163.07 0 top
JP221  [1X02_NO_SILK]  17.02,185.93 180 top
JP222  [USB-AB-MICRO-SMD_V03]  63.25,185.04 270 top
JP223  [JST-2-SMD]  46.1,174.5 90 top
JP224  [1X04_NO_SILK]  48.01,155.45 0 top
JP225  [1X01_NO_SILK]  67.06,177.04 0 top
JP226  [1X02_NO_SILK]  41.66,173.23 90 top
JP227  [SCREWTERMINAL-3.5MM-2-NS]  51.15,183.58 180 top
JP228  [SCREWTERMINAL-3.5MM-2-NS]  62.77,157.8 0 top
JP229  [1X02_NO_SILK]  65.79,155.45 180 top
JP230  [JST-2-PTH-NS]  64.52,160.21 180 top
JP231  [1X02_NO_SILK]  50.55,180.85 180 top
JP232  [1X02_NO_SILK]  60.71,155.45 180 top
JP233  [1X01_NO_SILK]  41.66,163.07 0 top
JP234  [1X02_NO_SILK]  50.55,185.93 180 top
JP235  [USB-AB-MICRO-SMD_V03]  96.77,185.04 270 top
JP236  [JST-2-SMD]  79.63,174.5 90 top
JP237  [1X04_NO_SILK]  81.53,155.45 0 top
JP238  [1X01_NO_SILK]  100.58,177.04 0 top
JP239  [1X02_NO_SILK]  75.18,173.23 90 top
JP240  [SCREWTERMINAL-3.5MM-2-NS]  84.68,183.58 180 top
JP241  [SCREWTERMINAL-3.5MM-2-NS]  96.29,157.8 0 top
JP242  [1X02_NO_SILK]  99.31,155.45 180 top
JP243  [JST-2-PTH-NS]  98.04,160.21 180 top
JP244  [1X02_NO_SILK]  84.07,180.85 180 top
JP245  [1X02_NO_SILK]  94.23,155.45 180 top
JP246  [1X01_NO_SILK]  75.18,163.07 0 top
JP247  [1X02_NO_SILK]  84.07,185.93 180 top
JP248  [USB-AB-MICRO-SMD_V03]  130.3,185.04 270 top
JP249  [JST-2-SMD]  113.16,174.5 90 top
JP250  [1X04_NO_SILK]  115.06,155.45 0 top
JP251  [1X01_NO_SILK]  134.11,177.04 0 top
JP252  [1X02_NO_SILK]  108.71,173.23 90 top
JP253  [SCREWTERMINAL-3.5MM-2-NS]  118.21,183.58 180 top
JP254  [SCREWTERMINAL-3.5MM-2-NS]  129.82,157.8 0 top
JP255  [1X02_NO_SILK]  132.84,155.45 180 top
JP256  [JST-2-PTH-NS]  131.57,160.21 180 top
JP257  [1X02_NO_SILK]  117.6,180.85 180 top
JP258  [1X02_NO_SILK]  127.76,155.45 180 top
JP259  [1X01_NO_SILK]  108.71,163.07 0 top
JP260  [1X02_NO_SILK]  117.6,185.93 180 top
JP261  [USB-AB-MICRO-SMD_V03]  29.72,221.87 270 top
JP262  [JST-2-SMD]  12.57,211.33 90 top
JP263  [1X04_NO_SILK]  14.48,192.28 0 top
JP264  [1X01_NO_SILK]  33.53,213.87 0 top
JP265  [1X02_NO_SILK]  8.13,210.06 90 top
JP266  [SCREWTERMINAL-3.5MM-2-NS]  17.62,220.41 180 top
JP267  [SCREWTERMINAL-3.5MM-2-NS]  29.24,194.63 0 top
JP268  [1X02_NO_SILK]  32.26,192.28 180 top
JP269  [JST-2-PTH-NS]  30.99,197.04 180 top
JP270  [1X02_NO_SILK]  17.02,217.68 180 top
JP271  [1X02_NO_SILK]  27.18,192.28 180 top
JP272  [1X01_NO_SILK]  8.13,199.9 0 top
JP273  [1X02_NO_SILK]  17.02,222.76 180 top
JP274  [USB-AB-MICRO-SMD_V03]  63.25,221.87 270 top
JP275  [JST-2-SMD]  46.1,211.33 90 top
JP276  [1X04_NO_SILK]  48.01,192.28 0 top
JP277  [1X01_NO_SILK]  67.06,213.87 0 top
JP278  [1X02_NO_SILK]  41.66,210.06 90 top
JP279  [SCREWTERMINAL-3.5MM-2-NS]  51.15,220.41 180 top
JP280  [SCREWTERMINAL-3.5MM-2-NS]  62.77,194.63 0 top
JP281  [1X02_NO_SILK]  65.79,192.28 180 top
JP282  [JST-2-PTH-NS]  64.52,197.04 180 top
JP283  [1X02_NO_SILK]  50.55,217.68 180 top
JP284  [1X02_NO_SILK]  60.71,192.28 180 top
JP285  [1X01_NO_SILK]  41.66,199.9 0 top
JP286  [1X02_NO_SILK]  50.55,222.76 180 top
JP287  [USB-AB-MICRO-SMD_V03]  96.77,221.87 270 top
JP288  [JST-2-SMD]  79.63,211.33 90 top
JP289  [1X04_NO_SILK]  81.53,192.28 0 top
JP290  [1X01_NO_SILK]  100.58,213.87 0 top
JP291  [1X02_NO_SILK]  75.18,210.06 90 top
JP292  [SCREWTERMINAL-3.5MM-2-NS]  84.68,220.41 180 top
JP293  [SCREWTERMINAL-3.5MM-2-NS]  96.29,194.63 0 top
JP294  [1X02_NO_SILK]  99.31,192.28 180 top
JP295  [JST-2-PTH-NS]  98.04,197.04 180 top
JP296  [1X02_NO_SILK]  84.07,217.68 180 top
JP297  [1X02_NO_SILK]  94.23,192.28 180 top
JP298  [1X01_NO_SILK]  75.18,199.9 0 top
JP299  [1X02_NO_SILK]  84.07,222.76 180 top
JP300  [USB-AB-MICRO-SMD_V03]  130.3,221.87 270 top
JP301  [JST-2-SMD]  113.16,211.33 90 top
JP302  [1X04_NO_SILK]  115.06,192.28 0 top
JP303  [1X01_NO_SILK]  134.11,213.87 0 top
JP304  [1X02_NO_SILK]  108.71,210.06 90 top
JP305  [SCREWTERMINAL-3.5MM-2-NS]  118.21,220.41 180 top
JP306  [SCREWTERMINAL-3.5MM-2-NS]  129.82,194.63 0 top
JP307  [1X02_NO_SILK]  132.84,192.28 180 top
JP308  [JST-2-PTH-NS]  131.57,197.04 180 top
JP309  [1X02_NO_SILK]  117.6,217.68 180 top
JP310  [1X02_NO_SILK]  127.76,192.28 180 top
JP311  [1X01_NO_SILK]  108.71,199.9 0 top
JP312  [1X02_NO_SILK]  117.6,222.76 180 top
JP313  [USB-AB-MICRO-SMD_V03]  29.72,258.7 270 top
JP314  [JST-2-SMD]  12.57,248.16 90 top
JP315  [1X04_NO_SILK]  14.48,229.11 0 top
JP316  [1X01_NO_SILK]  33.53,250.7 0 top
JP317  [1X02_NO_SILK]  8.13,246.89 90 top
JP318  [SCREWTERMINAL-3.5MM-2-NS]  17.62,257.24 180 top
JP319  [SCREWTERMINAL-3.5MM-2-NS]  29.24,231.46 0 top
JP320  [1X02_NO_SILK]  32.26,229.11 180 top
JP321  [JST-2-PTH-NS]  30.99,233.87 180 top
JP322  [1X02_NO_SILK]  17.02,254.51 180 top
JP323  [1X02_NO_SILK]  27.18,229.11 180 top
JP324  [1X01_NO_SILK]  8.13,236.73 0 top
JP325  [1X02_NO_SILK]  17.02,259.59 180 top
JP326  [USB-AB-MICRO-SMD_V03]  63.25,258.7 270 top
JP327  [JST-2-SMD]  46.1,248.16 90 top
JP328  [1X04_NO_SILK]  48.01,229.11 0 top
JP329  [1X01_NO_SILK]  67.06,250.7 0 top
JP330  [1X02_NO_SILK]  41.66,246.89 90 top
JP331  [SCREWTERMINAL-3.5MM-2-NS]  51.15,257.24 180 top
JP332  [SCREWTERMINAL-3.5MM-2-NS]  62.77,231.46 0 top
JP333  [1X02_NO_SILK]  65.79,229.11 180 top
JP334  [JST-2-PTH-NS]  64.52,233.87 180 top
JP335  [1X02_NO_SILK]  50.55,254.51 180 top
JP336  [1X02_NO_SILK]  60.71,229.11 180 top
JP337  [1X01_NO_SILK]  41.66,236.73 0 top
JP338  [1X02_NO_SILK]  50.55,259.59 180 top
JP339  [USB-AB-MICRO-SMD_V03]  96.77,258.7 270 top
JP340  [JST-2-SMD]  79.63,248.16 90 top
JP341  [1X04_NO_SILK]  81.53,229.11 0 top
JP342  [1X01_NO_SILK]  100.58,250.7 0 top
JP343  [1X02_NO_SILK]  75.18,246.89 90 top
JP344  [SCREWTERMINAL-3.5MM-2-NS]  84.68,257.24 180 top
JP345  [SCREWTERMINAL-3.5MM-2-NS]  96.29,231.46 0 top
JP346  [1X02_NO_SILK]  99.31,229.11 180 top
JP347  [JST-2-PTH-NS]  98.04,233.87 180 top
JP348  [1X02_NO_SILK]  84.07,254.51 180 top
JP349  [1X02_NO_SILK]  94.23,229.11 180 top
JP350  [1X01_NO_SILK]  75.18,236.73 0 top
JP351  [1X02_NO_SILK]  84.07,259.59 180 top
JP352  [USB-AB-MICRO-SMD_V03]  130.3,258.7 270 top
JP353  [JST-2-SMD]  113.16,248.16 90 top
JP354  [1X04_NO_SILK]  115.06,229.11 0 top
JP355  [1X01_NO_SILK]  134.11,250.7 0 top
JP356  [1X02_NO_SILK]  108.71,246.89 90 top
JP357  [SCREWTERMINAL-3.5MM-2-NS]  118.21,257.24 180 top
JP358  [SCREWTERMINAL-3.5MM-2-NS]  129.82,231.46 0 top
JP359  [1X02_NO_SILK]  132.84,229.11 180 top
JP360  [JST-2-PTH-NS]  131.57,233.87 180 top
JP361  [1X02_NO_SILK]  117.6,254.51 180 top
JP362  [1X02_NO_SILK]  127.76,229.11 180 top
JP363  [1X01_NO_SILK]  108.71,236.73 0 top
JP364  [1X02_NO_SILK]  117.6,259.59 180 top
LOGO1  SFE_LOGO_NAME.1_INCH  [SFE_LOGO_NAME_.1]  14.86,16.7 0 top
LOGO2  SFE_LOGO_NAME_FLAME.1_INCH  [SFE_LOGO_NAME_FLAME_.1]  29.72,22.67 0 bottom
LOGO3  OSHW-LOGOS  [OSHW-LOGO-S]  9.02,33.21 0 top
LOGO4  SFE_LOGO_NAME.1_INCH  [SFE_LOGO_NAME_.1]  48.39,16.7 0 top
LOGO5  OSHW-LOGOS  [OSHW-LOGO-S]  42.55,33.21 0 top
LOGO6  SFE_LOGO_NAME_FLAME.1_INCH  [SFE_LOGO_NAME_FLAME_.1]  63.25,22.67 0 bottom
LOGO7  SFE_LOGO_NAME.1_INCH  [SFE_LOGO_NAME_.1]  81.92,16.7 0 top
LOGO8  OSHW-LOGOS  [OSHW-LOGO-S]  76.07,33.21 0 top
LOGO9  SFE_LOGO_NAME_FLAME.1_INCH  [SFE_LOGO_NAME_FLAME_.1]  96.77,22.67 0 bottom
LOGO10  SFE_LOGO_NAME.1_INCH  [SFE_LOGO_NAME_.1]  115.44,16.7 0 top
LOGO11  OSHW-LOGOS  [OSHW-LOGO-S]  109.6,33.21 0 top
LOGO12  SFE_LOGO_NAME_FLAME.1_INCH  [SFE_LOGO_NAME_FLAME_.1]  130.3,22.67 0 bottom
LOGO13  SFE_LOGO_NAME.1_INCH  [SFE_LOGO_NAME_.1]  14.86,53.53 0 top
LOGO14  OSHW-LOGOS  [OSHW-LOGO-S]  9.02,70.04 0 top
LOGO15  SFE_LOGO_NAME_FLAME.1_INCH  [SFE_LOGO_NAME_FLAME_.1]  29.72,59.5 0 bottom
LOGO16  SFE_LOGO_NAME.1_INCH  [SFE_LOGO_NAME_.1]  48.39,53.53 0 top
LOGO17  OSHW-LOGOS  [OSHW-LOGO-S]  42.55,70.04 0 top
LOGO18  SFE_LOGO_NAME_FLAME.1_INCH  [SFE_LOGO_NAME_FLAME_.1]  63.25,59.5 0 bottom
LOGO19  SFE_LOGO_NAME.1_INCH  [SFE_LOGO_NAME_.1]  81.92,53.53 0 top
LOGO20  OSHW-LOGOS  [OSHW-LOGO-S]  76.07,70.04 0 top
LOGO21  SFE_LOGO_NAME_FLAME.1_INCH  [SFE_LOGO_NAME_FLAME_.1]  96.77,59.5 0 bottom
LOGO22  SFE_LOGO_NAME.1_INCH  [SFE_LOGO_NAME_.1]  115.44,53.53 0 top
LOGO23  OSHW-LOGOS  [OSHW-LOGO-S]  109.6,70.04 0 top
LOGO24  SFE_LOGO_NAME_FLAME.1_INCH  [SFE_LOGO_NAME_FLAME_.1]  130.3,59.5 0 bottom
LOGO25  SFE_LOGO_NAME.1_INCH  [SFE_LOGO_NAME_.1]  14.86,90.36 0 top
LOGO26  OSHW-LOGOS  [OSHW-LOGO-S]  9.02,106.87 0 top
LOGO27  SFE_LOGO_NAME_FLAME.1_INCH  [SFE_LOGO_NAME_FLAME_.1]  29.72,96.33 0 bottom
LOGO28  SFE_LOGO_NAME.1_INCH  [SFE_LOGO_NAME_.1]  48.39,90.36 0 top
LOGO29  OSHW-LOGOS  [OSHW-LOGO-S]  42.55,106.87 0 top
LOGO30  SFE_LOGO_NAME_FLAME.1_INCH  [SFE_LOGO_NAME_FLAME_.1]  63.25,96.33 0 bottom
LOGO31  SFE_LOGO_NAME.1_INCH  [SFE_LOGO_NAME_.1]  81.92,90.36 0 top
LOGO32  OSHW-LOGOS  [OSHW-LOGO-S]  76.07,106.87 0 top
LOGO33  SFE_LOGO_NAME_FLAME.1_INCH  [SFE_LOGO_NAME_FLAME_.1]  96.77,96.33 0 bottom
LOGO34  SFE_LOGO_NAME.1_INCH  [SFE_LOGO_NAME_.1]  115.44,90.36 0 top
LOGO35  OSHW-LOGOS  [OSHW-LOGO-S]  109.6,106.87 0 top
LOGO36  SFE_LOGO_NAME_FLAME.1_INCH  [SFE_LOGO_NAME_FLAME_.1]  130.3,96.33 0 bottom
LOGO37  SFE_LOGO_NAME.1_INCH  [SFE_LOGO_NAME_.1]  14.86,127.19 0 top
LOGO38  OSHW-LOGOS  [OSHW-LOGO-S]  9.02,143.7 0 top
LOGO39  SFE_LOGO_NAME_FLAME.1_INCH  [SFE_LOGO_NAME_FLAME_.1]  29.72,133.16 0 bottom
LOGO40  SFE_LOGO_NAME.1_INCH  [SFE_LOGO_NAME_.1]  48.39,127.19 0 top
LOGO41  OSHW-LOGOS  [OSHW-LOGO-S]  42.55,143.7 0 top
LOGO42  SFE_LOGO_NAME_FLAME.1_INCH  [SFE_LOGO_NAME_FLAME_.1]  63.25,133.16 0 bottom
LOGO43  SFE_LOGO_NAME.1_INCH  [SFE_LOGO_NAME_.1]  81.92,127.19 0 top
LOGO44  OSHW-LOGOS  [OSHW-LOGO-S]  76.07,143.7 0 top
LOGO45  SFE_LOGO_NAME_FLAME.1_INCH  [SFE_LOGO_NAME_FLAME_.1]  96.77,133.16 0 bottom
LOGO46  SFE_LOGO_NAME.1_INCH  [SFE_LOGO_NAME_.1]  115.44,127.19 0 top
LOGO47  OSHW-LOGOS  [OSHW-LOGO-S]  109.6,143.7 0 top
LOGO48  SFE_LOGO_NAME_FLAME.1_INCH  [SFE_LOGO_NAME_FLAME_.1]  130.3,133.16 0 bottom
LOGO49  SFE_LOGO_NAME.1_INCH  [SFE_LOGO_NAME_.1]  14.86,164.02 0 top
LOGO50  OSHW-LOGOS  [OSHW-LOGO-S]  9.02,180.53 0 top
LOGO51  SFE_LOGO_NAME_FLAME.1_INCH  [SFE_LOGO_NAME_FLAME_.1]  29.72,169.99 0 bottom
LOGO52  SFE_LOGO_NAME.1_INCH  [SFE_LOGO_NAME_.1]  48.39,164.02 0 top
LOGO53  OSHW-LOGOS  [OSHW-LOGO-S]  42.55,180.53 0 top
LOGO54  SFE_LOGO_NAME_FLAME.1_INCH  [SFE_LOGO_NAME_FLAME_.1]  63.25,169.99 0 bottom
LOGO55  SFE_LOGO_NAME.1_INCH  [SFE_LOGO_NAME_.1]  81.92,164.02 0 top
LOGO56  OSHW-LOGOS  [OSHW-LOGO-S]  76.07,180.53 0 top
LOGO57  SFE_LOGO_NAME_FLAME.1_INCH  [SFE_LOGO_NAME_FLAME_.1]  96.77,169.99 0 bottom
LOGO58  SFE_LOGO_NAME.1_INCH  [SFE_LOGO_NAME_.1]  115.44,164.02 0 top
LOGO59  OSHW-LOGOS  [OSHW-LOGO-S]  109.6,180.53 0 top
LOGO60  SFE_LOGO_NAME_FLAME.1_INCH  [SFE_LOGO_NAME_FLAME_.1]  130.3,169.99 0 bottom
LOGO61  SFE_LOGO_NAME.1_INCH  [SFE_LOGO_NAME_.1]  14.86,200.85 0 top
LOGO62  OSHW-LOGOS  [OSHW-LOGO-S]  9.02,217.36 0 top
LOGO63  SFE_LOGO_NAME_FLAME.1_INCH  [SFE_LOGO_NAME_FLAME_.1]  29.72,206.82 0 bottom
LOGO64  SFE_LOGO_NAME.1_INCH  [SFE_LOGO_NAME_.1]  48.39,200.85 0 top
LOGO65  OSHW-LOGOS  [OSHW-LOGO-S]  42.55,217.36 0 top
LOGO66  SFE_LOGO_NAME_FLAME.1_INCH  [SFE_LOGO_NAME_FLAME_.1]  63.25,206.82 0 bottom
LOGO67  SFE_LOGO_NAME.1_INCH  [SFE_LOGO_NAME_.1]  81.92,200.85 0 top
LOGO68  OSHW-LOGOS  [OSHW-LOGO-S]  76.07,217.36 0 top
LOGO69  SFE_LOGO_NAME_FLAME.1_INCH  [SFE_LOGO_NAME_FLAME_.1]  96.77,206.82 0 bottom
LOGO70  SFE_LOGO_NAME.1_INCH  [SFE_LOGO_NAME_.1]  115.44,200.85 0 top
LOGO71  OSHW-LOGOS  [OSHW-LOGO-S]  109.6,217.36 0 top
LOGO72  SFE_LOGO_NAME_FLAME.1_INCH  [SFE_LOGO_NAME_FLAME_.1]  130.3,206.82 0 bottom
LOGO73  SFE_LOGO_NAME.1_INCH  [SFE_LOGO_NAME_.1]  14.86,237.68 0 top
LOGO74  OSHW-LOGOS  [OSHW-LOGO-S]  9.02,254.19 0 top
LOGO75  SFE_LOGO_NAME_FLAME.1_INCH  [SFE_LOGO_NAME_FLAME_.1]  29.72,243.65 0 bottom
LOGO76  SFE_LOGO_NAME.1_INCH  [SFE_LOGO_NAME_.1]  48.39,237.68 0 top
LOGO77  OSHW-LOGOS  [OSHW-LOGO-S]  42.55,254.19 0 top
LOGO78  SFE_LOGO_NAME_FLAME.1_INCH  [SFE_LOGO_NAME_FLAME_.1]  63.25,243.65 0 bottom
LOGO79  SFE_LOGO_NAME.1_INCH  [SFE_LOGO_NAME_.1]  81.92,237.68 0 top
LOGO80  OSHW-LOGOS  [OSHW-LOGO-S]  76.07,254.19 0 top
LOGO81  SFE_LOGO_NAME_FLAME.1_INCH  [SFE_LOGO_NAME_FLAME_.1]  96.77,243.65 0 bottom
LOGO82  SFE_LOGO_NAME.1_INCH  [SFE_LOGO_NAME_.1]  115.44,237.68 0 top
LOGO83  OSHW-LOGOS  [OSHW-LOGO-S]  109.6,254.19 0 top
LOGO84  SFE_LOGO_NAME_FLAME.1_INCH  [SFE_LOGO_NAME_FLAME_.1]  130.3,243.65 0 bottom
R1  TS  [1/6W-RES]  10.67,18.29 180 top
R2  10K  [0603-RES]  10.67,20 180 top
R3  TMR  [1/6W-RES]  10.67,13.21 180 top
R4  ISET  [1/6W-RES]  36.07,18.29 0 top
R5  590  [0603-RES]  30.99,17.65 180 top
R6  ILIM  [1/6W-RES]  36.07,15.75 0 top
R7  1.1k  [0603-RES]  30.99,16.38 180 top
R8  100k  [0603-RES]  25.91,13.21 90 top
R9  180  [0603-RES]  20.83,34.16 270 top
R10  1K  [0603-RES]  23.37,34.16 270 top
R11  0.01  [1206]  22.73,30.99 180 top
R12  100k  [0603-RES]  33.53,32.26 270 top
R13  4.7K  [0603-RES]  18.29,13.21 270 top
R14  4.7K  [0603-RES]  20.83,13.21 270 top
R15  10K  [0603-RES]  23.37,13.21 270 top
R16  10K  [0603-RES]  29.08,20.19 90 top
R17  10K  [0603-RES]  27.81,20.19 90 top
R18  0.01  [1206]  56.26,30.99 180 top
R19  4.7K  [0603-RES]  51.82,13.21 270 top
R20  4.7K  [0603-RES]  54.36,13.21 270 top
R21  590  [0603-RES]  64.52,17.65 180 top
R22  1.1k  [0603-RES]  64.52,16.38 180 top
R23  180  [0603-RES]  54.36,34.16 270 top
R24  1K  [0603-RES]  56.9,34.16 270 top
R25  100k  [0603-RES]  59.44,13.21 90 top
R26  10K  [0603-RES]  62.61,20.19 90 top
R27  10K  [0603-RES]  61.34,20.19 90 top
R28  ILIM  [1/6W-RES]  69.6,15.75 0 top
R29  ISET  [1/6W-RES]  69.6,18.29 0 top
R30  10K  [0603-RES]  44.2,20 180 top
R31  TMR  [1/6W-RES]  44.2,13.21 180 top
R32  100k  [0603-RES]  67.06,32.26 270 top
R33  TS  [1/6W-RES]  44.2,18.29 180 top
R34  10K  [0603-RES]  56.9,13.21 270 top
R35  0.01  [1206]  89.79,30.99 180 top
R36  4.7K  [0603-RES]  85.34,13.21 270 top
R37  4.7K  [0603-RES]  87.88,13.21 270 top
R38  590  [0603-RES]  98.04,17.65 180 top
R39  1.1k  [0603-RES]  98.04,16.38 180 top
R40  180  [0603-RES]  87.88,34.16 270 top
R41  1K  [0603-RES]  90.42,34.16 270 top
R42  100k  [0603-RES]  92.96,13.21 90 top
R43  10K  [0603-RES]  96.14,20.19 90 top
R44  10K  [0603-RES]  94.87,20.19 90 top
R45  ILIM  [1/6W-RES]  103.12,15.75 0 top
R46  ISET  [1/6W-RES]  103.12,18.29 0 top
R47  10K  [0603-RES]  77.72,20 180 top
R48  TMR  [1/6W-RES]  77.72,13.21 180 top
R49  100k  [0603-RES]  100.58,32.26 270 top
R50  TS  [1/6W-RES]  77.72,18.29 180 top
R51  10K  [0603-RES]  90.42,13.21 270 top
R52  0.01  [1206]  123.32,30.99 180 top
R53  4.7K  [0603-RES]  118.87,13.21 270 top
R54  4.7K  [0603-RES]  121.41,13.21 270 top
R55  590  [0603-RES]  131.57,17.65 180 top
R56  1.1k  [0603-RES]  131.57,16.38 180 top
R57  180  [0603-RES]  121.41,34.16 270 top
R58  1K  [0603-RES]  123.95,34.16 270 top
R59  100k  [0603-RES]  126.49,13.21 90 top
R60  10K  [0603-RES]  129.67,20.19 90 top
R61  10K  [0603-RES]  128.4,20.19 90 top
R62  ILIM  [1/6W-RES]  136.65,15.75 0 top
R63  ISET  [1/6W-RES]  136.65,18.29 0 top
R64  10K  [0603-RES]  111.25,20 180 top
R65  TMR  [1/6W-RES]  111.25,13.21 180 top
R66  100k  [0603-RES]  134.11,32.26 270 top
R67  TS  [1/6W-RES]  111.25,18.29 180 top
R68  10K  [0603-RES]  123.95,13.21 270 top
R69  0.01  [1206]  22.73,67.82 180 top
R70  4.7K  [0603-RES]  18.29,50.04 270 top
R71  4.7K  [0603-RES]  20.83,50.04 270 top
R72  590  [0603-RES]  30.99,54.48 180 top
R73  1.1k  [0603-RES]  30.99,53.21 180 top
R74  180  [0603-RES]  20.83,70.99 270 top
R75  1K  [0603-RES]  23.37,70.99 270 top
R76  100k  [0603-RES]  25.91,50.04 90 top
R77  10K  [0603-RES]  29.08,57.02 90 top
R78  10K  [0603-RES]  27.81,57.02 90 top
R79  ILIM  [1/6W-RES]  36.07,52.58 0 top
R80  ISET  [1/6W-RES]  36.07,55.12 0 top
R81  10K  [0603-RES]  10.67,56.83 180 top
R82  TMR  [1/6W-RES]  10.67,50.04 180 top
R83  100k  [0603-RES]  33.53,69.09 270 top
R84  TS  [1/6W-RES]  10.67,55.12 180 top
R85  10K  [0603-RES]  23.37,50.04 270 top
R86  0.01  [1206]  56.26,67.82 180 top
R87  4.7K  [0603-RES]  51.82,50.04 270 top
R88  4.7K  [0603-RES]  54.36,50.04 270 top
R89  590  [0603-RES]  64.52,54.48 180 top
R90  1.1k  [0603-RES]  64.52,53.21 180 top
R91  180  [0603-RES]  54.36,70.99 270 top
R92  1K  [0603-RES]  56.9,70.99 270 top
R93  100k  [0603-RES]  59.44,50.04 90 top
R94  10K  [0603-RES]  62.61,57.02 90 top
R95  10K  [0603-RES]  61.34,57.02 90 top
R96  ILIM  [1/6W-RES]  69.6,52.58 0 top
R97  ISET  [1/6W-RES]  69.6,55.12 0 top
R98  10K  [0603-RES]  44.2,56.83 180 top
R99  TMR  [1/6W-RES]  44.2,50.04 180 top
R100  100k  [0603-RES]  67.06,69.09 270 top
R101  TS  [1/6W-RES]  44.2,55.12 180 top
R102  10K  [0603-RES]  56.9,50.04 270 top
R103  0.01  [1206]  89.79,67.82 180 top
R104  4.7K  [0603-RES]  85.34,50.04 270 top
R105  4.7K  [0603-RES]  87.88,50.04 270 top
R106  590  [0603-RES]  98.04,54.48 180 top
R107  1.1k  [0603-RES]  98.04,53.21 180 top
R108  180  [0603-RES]  87.88,70.99 270 top
R109  1K  [0603-RES]  90.42,70.99 270 top
R110  100k  [0603-RES]  92.96,50.04 90 top
R111  10K  [0603-RES]  96.14,57.02 90 top
R112  10K  [0603-RES]  94.87,57.02 90 top
R113  ILIM  [1/6W-RES]  103.12,52.58 0 top
R114  ISET  [1/6W-RES]  103.12,55.12 0 top
R115  10K  [0603-RES]  77.72,56.83 180 top
R116  TMR  [1/6W-RES]  77.72,50.04 180 top
R117  100k  [0603-RES]  100.58,69.09 270 top
R118  TS  [1/6W-RES]  77.72,55.12 180 top
R119  10K  [0603-RES]  90.42,50.04 270 top
R120  0.01  [1206]  123.32,67.82 180 top
R121  4.7K  [0603-RES]  118.87,50.04 270 top
R122  4.7K  [0603-RES]  121.41,50.04 270 top
R123  590  [0603-RES]  131.57,54.48 180 top
R124  1.1k  [0603-RES]  131.57,53.21 180 top
R125  180  [0603-RES]  121.41,70.99 270 top
R126  1K  [0603-RES]  123.95,70.99 270 top
R127  100k  [0603-RES]  126.49,50.04 90 top
R128  10K  [0603-RES]  129.67,57.02 90 top
R129  10K  [0603-RES]  128.4,57.02 90 top
R130  ILIM  [1/6W-RES]  136.65,52.58 0 top
R131  ISET  [1/6W-RES]  136.65,55.12 0 top
R132  10K  [0603-RES]  111.25,56.83 180 top
R133  TMR  [1/6W-RES]  111.25,50.04 180 top
R134  100k  [0603-RES]  134.11,69.09 270 top
R135  TS  [1/6W-RES]  111.25,55.12 180 top
R136  10K  [0603-RES]  123.95,50.04 270 top
R137  0.01  [1206]  22.73,104.65 180 top
R138  4.7K  [0603-RES]  18.29,86.87 270 top
R139  4.7K  [0603-RES]  20.83,86.87 270 top
R140  590  [0603-RES]  30.99,91.31 180 top
R141  1.1k  [0603-RES]  30.99,90.04 180 top
R142  180  [0603-RES]  20.83,107.82 270 top
R143  1K  [0603-RES]  23.37,107.82 270 top
R144  100k  [0603-RES]  25.91,86.87 90 top
R145  10K  [0603-RES]  29.08,93.85 90 top
R146  10K  [0603-RES]  27.81,93.85 90 top
R147  ILIM  [1/6W-RES]  36.07,89.41 0 top
R148  ISET  [1/6W-RES]  36.07,91.95 0 top
R149  10K  [0603-RES]  10.67,93.66 180 top
R150  TMR  [1/6W-RES]  10.67,86.87 180 top
R151  100k  [0603-RES]  33.53,105.92 270 top
R152  TS  [1/6W-RES]  10.67,91.95 180 top
R153  10K  [0603-RES]  23.37,86.87 270 top
R154  0.01  [1206]  56.26,104.65 180 top
R155  4.7K  [0603-RES]  51.82,86.87 270 top
R156  4.7K  [0603-RES]  54.36,86.87 270 top
R157  590  [0603-RES]  64.52,91.31 180 top
R158  1.1k  [0603-RES]  64.52,90.04 180 top
R159  180  [0603-RES]  54.36,107.82 270 top
R160  1K  [0603-RES]  56.9,107.82 270 top
R161  100k  [0603-RES]  59.44,86.87 90 top
R162  10K  [0603-RES]  62.61,93.85 90 top
R163  10K  [0603-RES]  61.34,93.85 90 top
R164  ILIM  [1/6W-RES]  69.6,89.41 0 top
R165  ISET  [1/6W-RES]  69.6,91.95 0 top
R166  10K  [0603-RES]  44.2,93.66 180 top
R167  TMR  [1/6W-RES]  44.2,86.87 180 top
R168  100k  [0603-RES]  67.06,105.92 270 top
R169  TS  [1/6W-RES]  44.2,91.95 180 top
R170  10K  [0603-RES]  56.9,86.87 270 top
R171  0.01  [1206]  89.79,104.65 180 top
R172  4.7K  [0603-RES]  85.34,86.87 270 top
R173  4.7K  [0603-RES]  87.88,86.87 270 top
R174  590  [0603-RES]  98.04,91.31 180 top
R175  1.1k  [0603-RES]  98.04,90.04 180 top
R176  180  [0603-RES]  87.88,107.82 270 top
R177  1K  [0603-RES]  90.42,107.82 270 top
R178  100k  [0603-RES]  92.96,86.87 90 top
R179  10K  [0603-RES]  96.14,93.85 90 top
R180  10K  [0603-RES]  94.87,93.85 90 top
R181  ILIM  [1/6W-RES]  103.12,89.41 0 top
R182  ISET  [1/6W-RES]  103.12,91.95 0 top
R183  10K  [0603-RES]  77.72,93.66 180 top
R184  TMR  [1/6W-RES]  77.72,86.87 180 top
R185  100k  [0603-RES]  100.58,105.92 270 top
R186  TS  [1/6W-RES]  77.72,91.95 180 top
R187  10K  [0603-RES]  90.42,86.87 270 top
R188  0.01  [1206]  123.32,104.65 180 top
R189  4.7K  [0603-RES]  118.87,86.87 270 top
R190  4.7K  [0603-RES]  121.41,86.87 270 top
R191  590  [0603-RES]  131.57,91.31 180 top
R192  1.1k  [0603-RES]  131.57,90.04 180 top
R193  180  [0603-RES]  121.41,107.82 270 top
R194  1K  [0603-RES]  123.95,107.82 270 top
R195  100k  [0603-RES]  126.49,86.87 90 top
R196  10K  [0603-RES]  129.67,93.85 90 top
R197  10K  [0603-RES]  128.4,93.85 90 top
R198  ILIM  [1/6W-RES]  136.65,89.41 0 top
R199  ISET  [1/6W-RES]  136.65,91.95 0 top
R200  10K  [0603-RES]  111.25,93.66 180 top
R201  TMR  [1/6W-RES]  111.25,86.87 180 top
R202  100k  [0603-RES]  134.11,105.92 270 top
R203  TS  [1/6W-RES]  111.25,91.95 180 top
R204  10K  [0603-RES]  123.95,86.87 270 top
R205  0.01  [1206]  22.73,141.48 180 top
R206  4.7K  [0603-RES]  18.29,123.7 270 top
R207  4.7K  [0603-RES]  20.83,123.7 270 top
R208  590  [0603-RES]  30.99,128.14 180 top
R209  1.1k  [0603-RES]  30.99,126.87 180 top
R210  180  [0603-RES]  20.83,144.65 270 top
R211  1K  [0603-RES]  23.37,144.65 270 top
R212  100k  [0603-RES]  25.91,123.7 90 top
R213  10K  [0603-RES]  29.08,130.68 90 top
R214  10K  [0603-RES]  27.81,130.68 90 top
R215  ILIM  [1/6W-RES]  36.07,126.24 0 top
R216  ISET  [1/6W-RES]  36.07,128.78 0 top
R217  10K  [0603-RES]  10.67,130.49 180 top
R218  TMR  [1/6W-RES]  10.67,123.7 180 top
R219  100k  [0603-RES]  33.53,142.75 270 top
R220  TS  [1/6W-RES]  10.67,128.78 180 top
R221  10K  [0603-RES]  23.37,123.7 270 top
R222  0.01  [1206]  56.26,141.48 180 top
R223  4.7K  [0603-RES]  51.82,123.7 270 top
R224  4.7K  [0603-RES]  54.36,123.7 270 top
R225  590  [0603-RES]  64.52,128.14 180 top
R226  1.1k  [0603-RES]  64.52,126.87 180 top
R227  180  [0603-RES]  54.36,144.65 270 top
R228  1K  [0603-RES]  56.9,144.65 270 top
R229  100k  [0603-RES]  59.44,123.7 90 top
R230  10K  [0603-RES]  62.61,130.68 90 top
R231  10K  [0603-RES]  61.34,130.68 90 top
R232  ILIM  [1/6W-RES]  69.6,126.24 0 top
R233  ISET  [1/6W-RES]  69.6,128.78 0 top
R234  10K  [0603-RES]  44.2,130.49 180 top
R235  TMR  [1/6W-RES]  44.2,123.7 180 top
R236  100k  [0603-RES]  67.06,142.75 270 top
R237  TS  [1/6W-RES]  44.2,128.78 180 top
R238  10K  [0603-RES]  56.9,123.7 270 top
R239  0.01  [1206]  89.79,141.48 180 top
R240  4.7K  [0603-RES]  85.34,123.7 270 top
R241  4.7K  [0603-RES]  87.88,123.7 270 top
R242  590  [0603-RES]  98.04,128.14 180 top
R243  1.1k  [0603-RES]  98.04,126.87 180 top
R244  180  [0603-RES]  87.88,144.65 270 top
R245  1K  [0603-RES]  90.42,144.65 270 top
R246  100k  [0603-RES]  92.96,123.7 90 top
R247  10K  [0603-RES]  96.14,130.68 90 top
R248  10K  [0603-RES]  94.87,130.68 90 top
R249  ILIM  [1/6W-RES]  103.12,126.24 0 top
R250  ISET  [1/6W-RES]  103.12,128.78 0 top
R251  10K  [0603-RES]  77.72,130.49 180 top
R252  TMR  [1/6W-RES]  77.72,123.7 180 top
R253  100k  [0603-RES]  100.58,142.75 270 top
R254  TS  [1/6W-RES]  77.72,128.78 180 top
R255  10K  [0603-RES]  90.42,123.7 270 top
R256  0.01  [1206]  123.32,141.48 180 top
R257  4.7K  [0603-RES]  118.87,123.7 270 top
R258  4.7K  [0603-RES]  121.41,123.7 270 top
R259  590  [0603-RES]  131.57,128.14 180 top
R260  1.1k  [0603-RES]  131.57,126.87 180 top
R261  180  [0603-RES]  121.41,144.65 270 top
R262  1K  [0603-RES]  123.95,144.65 270 top
R263  100k  [0603-RES]  126.49,123.7 90 top
R264  10K  [0603-RES]  129.67,130.68 90 top
R265  10K  [0603-RES]  128.4,130.68 90 top
R266  ILIM  [1/6W-RES]  136.65,126.24 0 top
R267  ISET  [1/6W-RES]  136.65,128.78 0 top
R268  10K  [0603-RES]  111.25,130.49 180 top
R269  TMR  [1/6W-RES]  111.25,123.7 180 top
R270  100k  [0603-RES]  134.11,142.75 270 top
R271  TS  [1/6W-RES]  111.25,128.78 180 top
R272  10K  [0603-RES]  123.95,123.7 270 top
R273  0.01  [1206]  22.73,178.31 180 top
R274  4.7K  [0603-RES]  18.29,160.53 270 top
R275  4.7K  [0603-RES]  20.83,160.53 270 top
R276  590  [0603-RES]  30.99,164.97 180 top
R277  1.1k  [0603-RES]  30.99,163.7 180 top
R278  180  [0603-RES]  20.83,181.48 270 top
R279  1K  [0603-RES]  23.37,181.48 270 top
R280  100k  [0603-RES]  25.91,160.53 90 top
R281  10K  [0603-RES]  29.08,167.51 90 top
R282  10K  [0603-RES]  27.81,167.51 90 top
R283  ILIM  [1/6W-RES]  36.07,163.07 0 top
R284  ISET  [1/6W-RES]  36.07,165.61 0 top
R285  10K  [0603-RES]  10.67,167.32 180 top
R286  TMR  [1/6W-RES]  10.67,160.53 180 top
R287  100k  [0603-RES]  33.53,179.58 270 top
R288  TS  [1/6W-RES]  10.67,165.61 180 top
R289  10K  [0603-RES]  23.37,160.53 270 top
R290  0.01  [1206]  56.26,178.31 180 top
R291  4.7K  [0603-RES]  51.82,160.53 270 top
R292  4.7K  [0603-RES]  54.36,160.53 270 top
R293  590  [0603-RES]  64.52,164.97 180 top
R294  1.1k  [0603-RES]  64.52,163.7 180 top
R295  180  [0603-RES]  54.36,181.48 270 top
R296  1K  [0603-RES]  56.9,181.48 270 top
R297  100k  [0603-RES]  59.44,160.53 90 top
R298  10K  [0603-RES]  62.61,167.51 90 top
R299  10K  [0603-RES]  61.34,167.51 90 top
R300  ILIM  [1/6W-RES]  69.6,163.07 0 top
R301  ISET  [1/6W-RES]  69.6,165.61 0 top
R302  10K  [0603-RES]  44.2,167.32 180 top
R303  TMR  [1/6W-RES]  44.2,160.53 180 top